# Altium PCB LED_Base_V1.PcbDoc
Units mil, origin at the board's own origin, x right, y up, seen from the top; angles counter-clockwise.
Board outline 1181.1 x 1181.1 mil, 2 copper layers (Top Layer, Bottom Layer); 15 components, 14 nets, 54 pads, 19 vias.
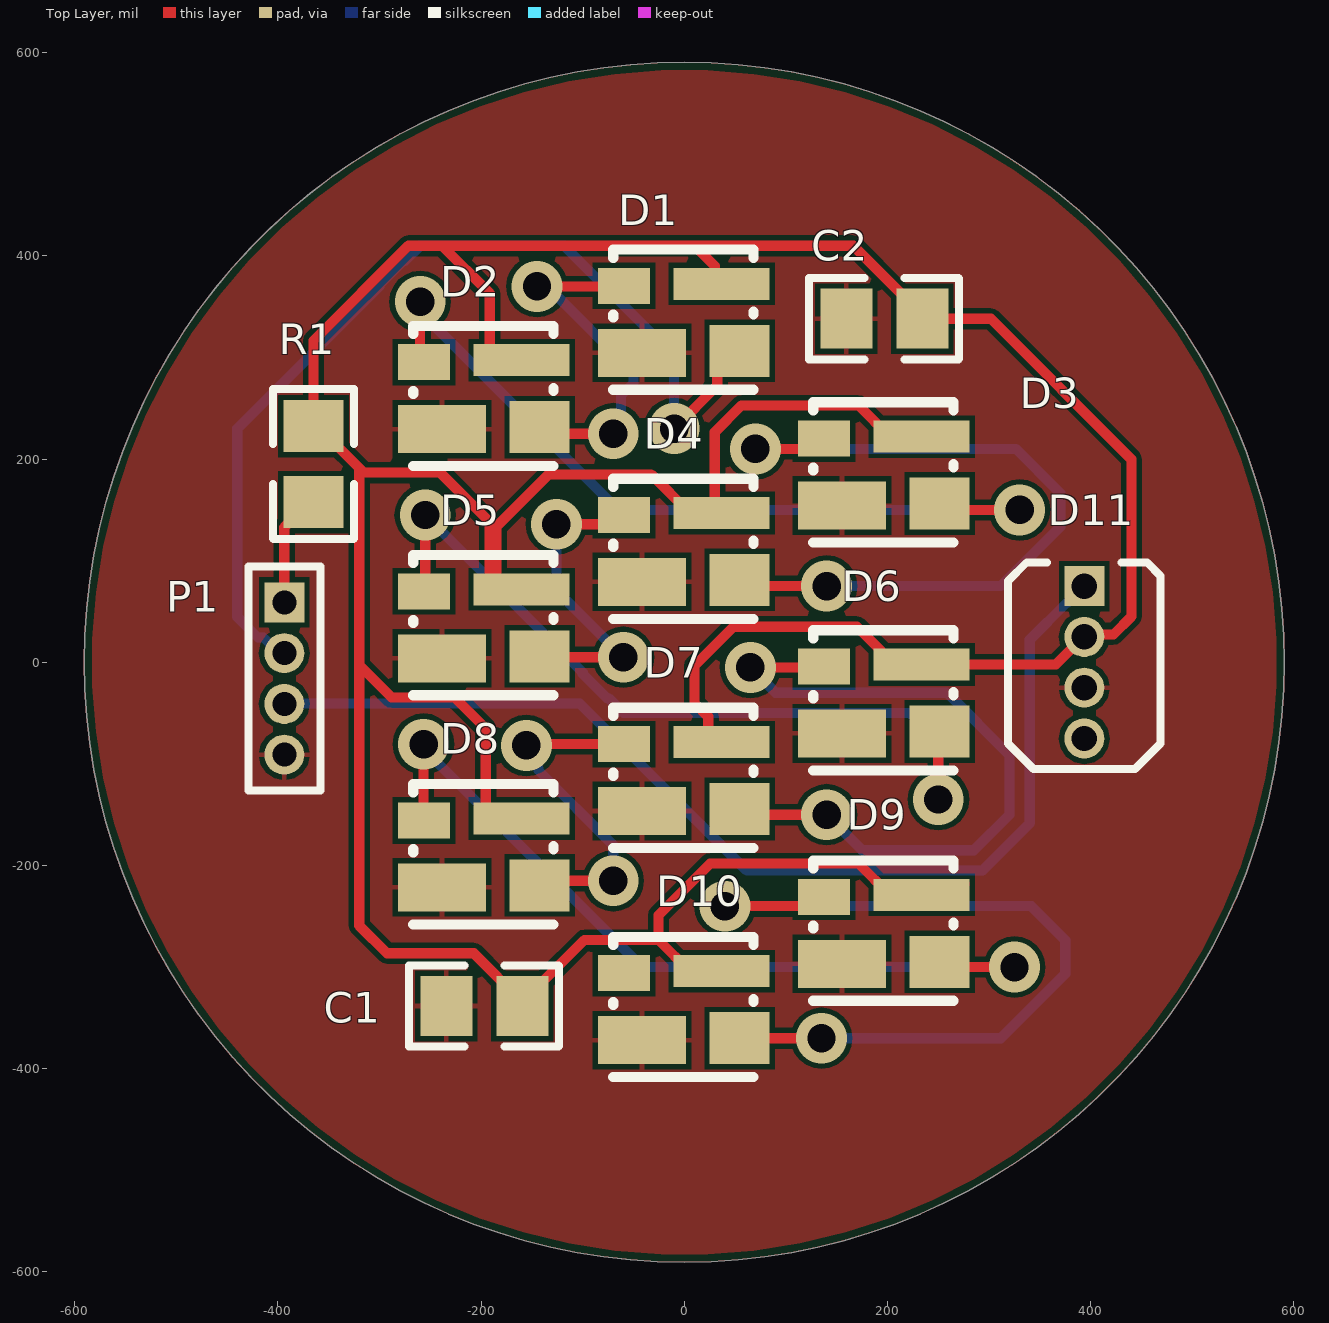
[diagram p0: Top Layer view]
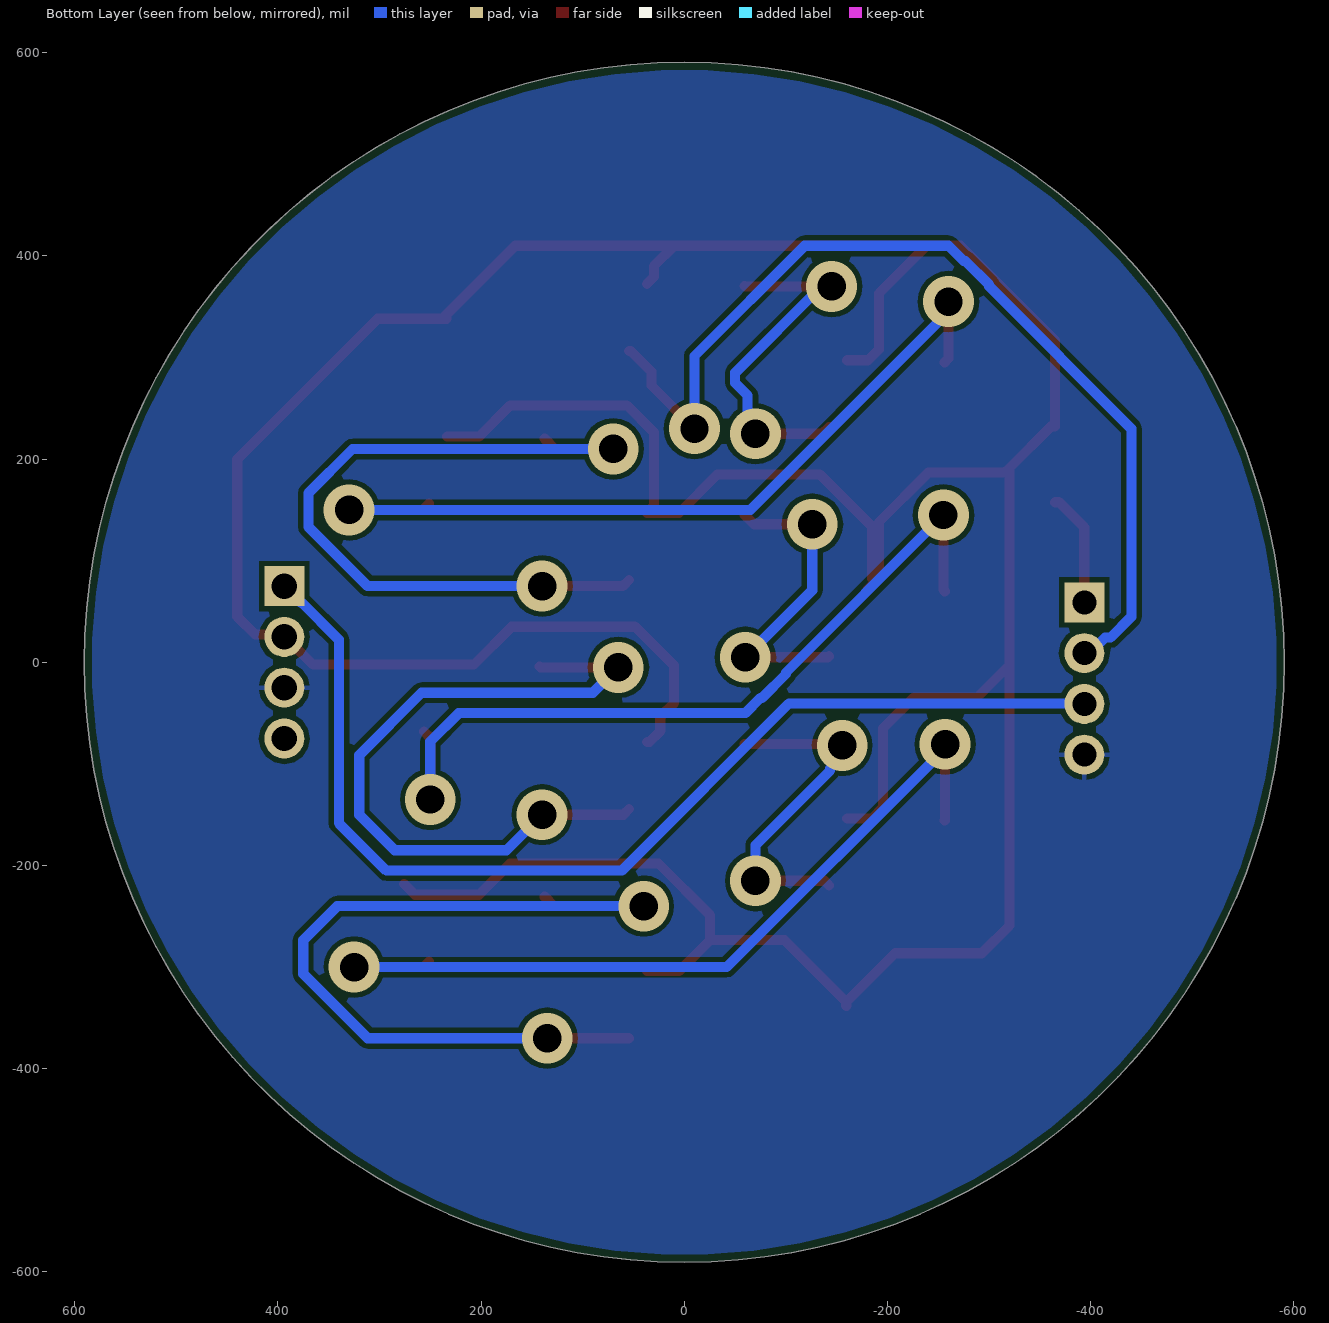
[diagram p1: Bottom Layer view, seen from below]
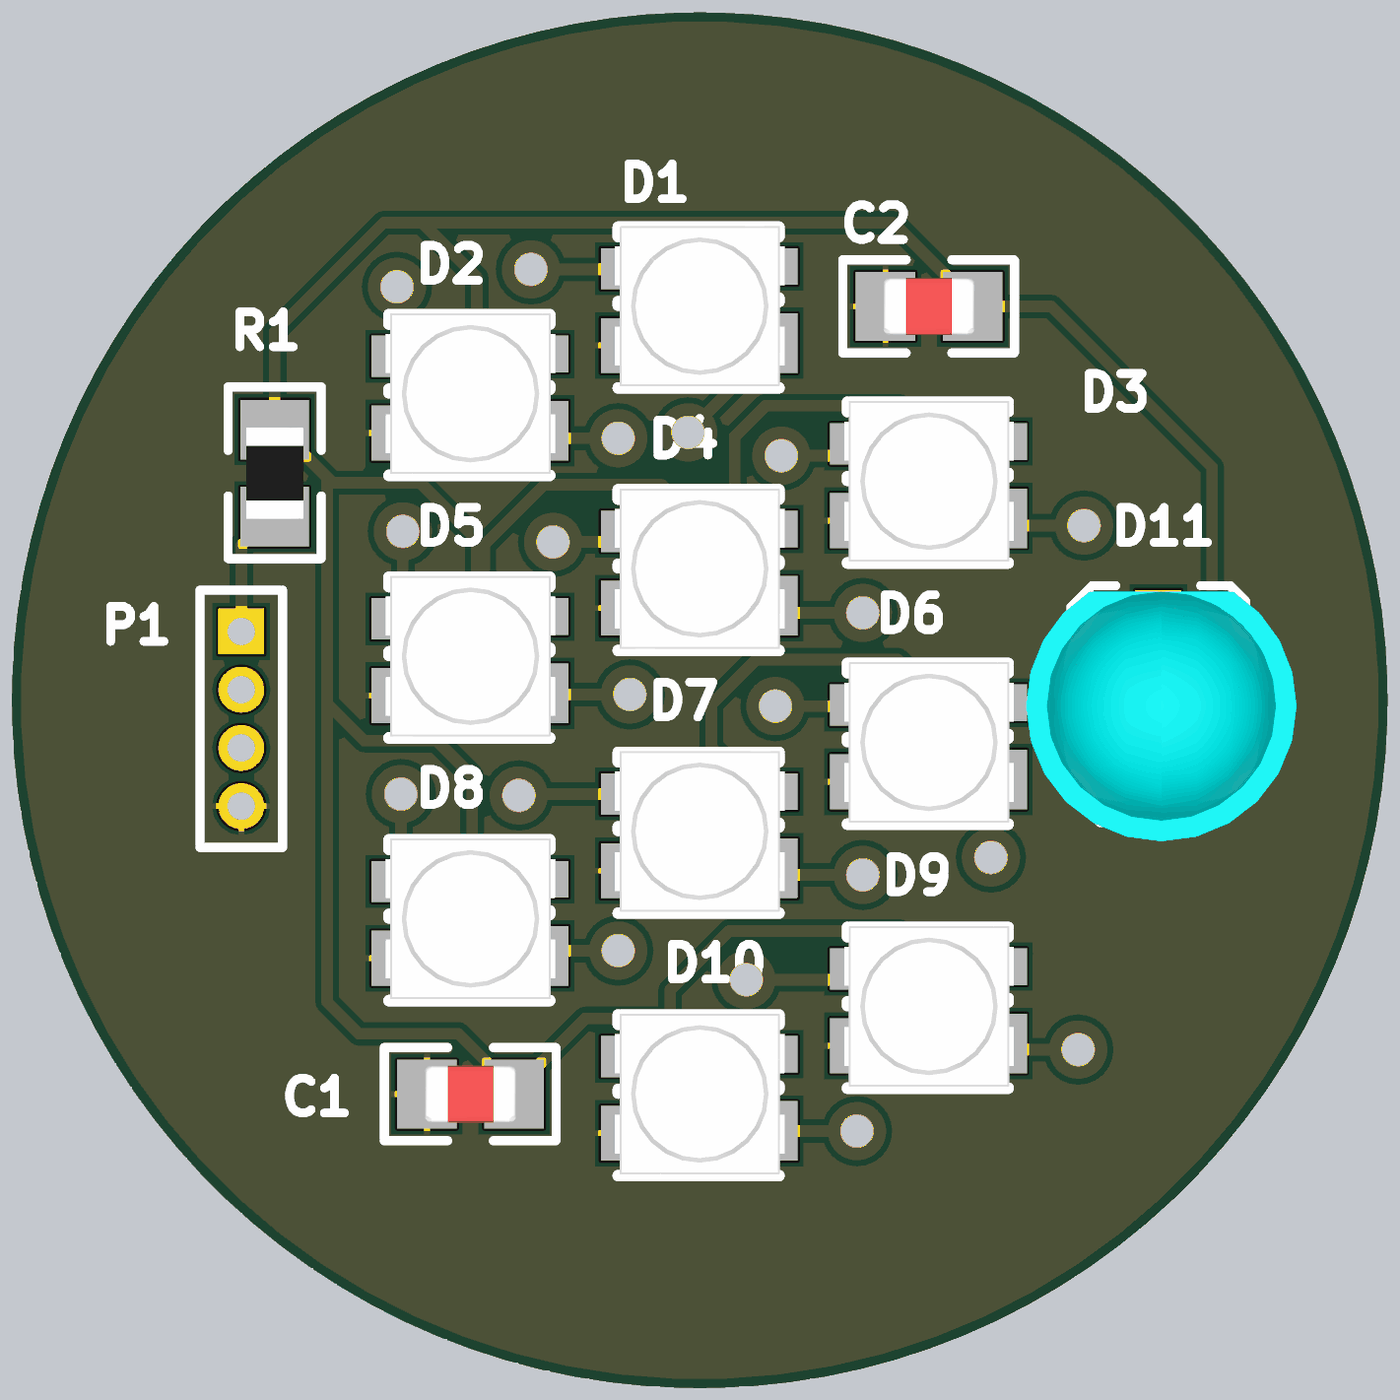
[diagram p2: 3D render of the assembled board from above, using the file's embedded part models]

## Layer stack, top to bottom
Top Solder: solder mask 0.4, Solder Resist, Dk 3.5
Top Layer: signal copper 1.4
Dielectric 1: dielectric 12.6, FR-4, Dk 4.8
Bottom Layer: signal copper 1.4
Bottom Solder: solder mask 0.4, Solder Resist, Dk 3.5

## Board outline
0,-590.55 cw(c0,0) -590.55,0 cw(c0,0) 0,590.55 cw(c0,0) 590.55,0 cw(c0,0)

## Design rules (kind name [scope] priority, off if disabled: settings)
BoardOutlineClearance [All] p1: gap=7.87 ignorepadtopadclearanceinfootprint=FALSE
Clearance [All] p1: gap=5 ignorepadtopadclearanceinfootprint=TRUE except(10: Arc-Hole Track-Hole SMDPad-Hole THPad-Hole Via-Hole Fill-Hole Poly-Hole Region-Hole Text-Hole)
ComponentClearance [All] p1: gap=5 collisioncheckmode=3 verticalgap=5 showdistances=TRUE
DiffPairsRouting [All] p1: maxlimit=10 minlimit=5 mostfreqgap=5 toplayer_minwidth=5 toplayer_maxwidth=1000 toplayer_prefwidth=5 bottomlayer_minwidth=5 bottomlayer_maxwidth=1000 bottomlayer_prefwidth=5 maxuncoupledlength=500
Height [All] p1: minheight=0 maxheight=71497.94 prefheight=500
HoleSize [All] p1: absolutevalues=TRUE maxlimit=248.03 minlimit=11.81 maxpercent=80.000 minpercent=20.000
HoleToHoleClearance [All] p1: gap=10 allowstackedmicrovias=FALSE
MinimumAnnularRing [All] p1: minimumring=6
MinimumSolderMaskSliver [All] p1: minsoldermaskwidth=6
PlaneClearance [All] p1: clearance=5
PlaneConnect PlaneConnectPowerPads [InPadClass('PowerPads')] p1: planeconnectstyle=Direct reliefexpansion=20 reliefentries=4 reliefconductorwidth=10 reliefairgap=10
PlaneConnect [All] p2: pad.planeconnectstyle=Relief pad.reliefexpansion=11.81 pad.reliefentries=4 pad.reliefconductorwidth=5 pad.reliefairgap=5 via.planeconnectstyle=Direct via.reliefexpansion=11.81 via.reliefentries=4 via.reliefconductorwidth=5 via.reliefairgap=5
PolygonConnect PolygonConnectPowerPads [All vs (InPadClass('PowerPads'))] p1: connectstyle=Direct reliefconductorwidth=10 reliefentries=4 polygonreliefangle="90 Angle" airgapwidth=10
PolygonConnect [All] p2: thpad.connectstyle=Relief thpad.reliefconductorwidth=5 thpad.reliefentries=4 thpad.polygonreliefangle="90 Angle" thpad.airgapwidth=5 smdpad.connectstyle=Relief smdpad.reliefconductorwidth=5 smdpad.reliefentries=4 smdpad.polygonreliefangle="90 Angle" smdpad.airgapwidth=5 via.connectstyle=Direct via.reliefconductorwidth=5 via.reliefentries=4 via.polygonreliefangle="90 Angle" via.airgapwidth=5
RoomDefinition Sheet1 [InComponentClass('Sheet1')] p1: confinementstyle=ConfineIn formatcopy=TRUE lockcomponents=FALSE outline -500,-495 530,-495 530,540 -500,540
RoutingVias [All] p1: holewidth=11.81 width=23.62 viastyle="Through Hole" minholewidth=11.81 minwidth=23.62 maxholewidth=23.62 maxwidth=259.84
SilkToSilkClearance [All] p1: silktosilkclearance=5
SilkToSolderMaskClearance [IsPad] p1: minsilkscreentomaskgap=5 clearancetoexposedcopper=TRUE
SolderMaskExpansion [All] p1: expansion=2 istentingtop=FALSE
UnRoutedNet [All] p1: checkbadconnections=TRUE
Width Width_10mil [All] p1: maxlimit=1000 minlimit=10 preferedwidth=10 minimp=50.000000 maximp=50.000000 favimp=50.000000
Width Width_6mil [All] p2: maxlimit=1000 minlimit=6 preferedwidth=6 minimp=50.000000 maximp=50.000000 favimp=50.000000
Width Power_20mil [All] p3: maxlimit=1000 minlimit=20 preferedwidth=20 minimp=50.000000 maximp=50.000000 favimp=50.000000
Width Power_12mil [All] p4: maxlimit=1000 minlimit=12 preferedwidth=12 minimp=50.000000 maximp=50.000000 favimp=50.000000
Width Width_5mil [All] p5: maxlimit=1000 minlimit=5 preferedwidth=5 minimp=50.000000 maximp=50.000000 favimp=50.000000
Width [All] p6: maxlimit=10 minlimit=10 preferedwidth=10
19 further rules are at their usual default settings.

## Components (designator, comment, footprint, x,y, rotation, side; value= is the part's Value field where it differs from the comment)
C1 "47uF" 0805C -196.85,-338.23 r180 top
C2 "47uF" 0805C 196.85,338.23 r180 top
D1 "Diode_SK6812MINI" SK6812MINI 0,338.23 r0 top
D2 "Diode_SK6812MINI" SK6812MINI -196.85,263.07 r0 top
D3 "Diode_SK6812MINI" SK6812MINI 196.85,187.91 r0 top
D4 "Diode_SK6812MINI" SK6812MINI 0,112.76 r0 top
D5 "Diode_SK6812MINI" SK6812MINI -196.85,37.6 r0 top
D6 "Diode_SK6812MINI" SK6812MINI 196.85,-36.38 r0 top
D7 "Diode_SK6812MINI" SK6812MINI 0,-112.76 r0 top
D8 "Diode_SK6812MINI" SK6812MINI -196.85,-187.91 r0 top
D9 "Diode_SK6812MINI" SK6812MINI 196.85,-263.07 r0 top
D10 "Diode_SK6812MINI" SK6812MINI 0,-338.23 r0 top
D11 "WS2812_Through_Hole" WS2812_THROUGH_HOLE 393.7,0 r0 top
P1 "MHDR1X4" MHDR1X4 -393.7,59.06 r270 top
R1 "470" 0805 -365,195 r90 top

## Footprints (in the part's own frame and the unit in brackets; to place one, negate y for a bottom-side part, rotate by r counter-clockwise, add the part's x,y. Pads: shape width x height; smd on the part's side, far side on the other; paste and mask are expansions set on the pad)
0805 [mm] "0805 Footprint"
  rect 1.3x1.5 smd: 1(-0.95,0) 2(0.95,0)
  silkscreen extent -1.87,-1.02 1.88,1.02, body extent -1,-0.63 1,0.62, height 0.5
0805C [mm] "0805 Footprint"
  rect 1.3x1.5 smd: 1(-0.95,0) 2(0.95,0)
  silkscreen extent -1.87,-1.02 1.88,1.02, body extent -1,-0.62 1,0.63, height 0.78
MHDR1X4 [mm] "Connector; Header; 4 Position"
  rect 1x1 hole 0.6: 1(0,0)
  round 1 hole 0.6: 2(1.27,0) 3(2.54,0) 4(3.81,0)
  silkscreen extent -0.9,-0.9 4.71,0.9
SK6812MINI [mm] "SMD LED 3535"
  rect 1.3x0.9 smd: 1(-1.509,0.82)
  rect 2.2x1.2 smd: 2(-1.059,-0.854)
  rect 1.5x1.3 smd: 3(1.385,-0.804)
  rect 2.4x0.8 smd: 4(0.935,0.87)
  silkscreen extent -1.78,-1.78 1.73,1.73, body extent -1.85,-1.75 1.85,1.75, height 1.1
WS2812_THROUGH_HOLE [mm] "THD, 4-Leads, Dia 5.9mm, Pitch 1.27mm"
  rect 1x1 hole 0.635 paste+0: 1(0,1.905)
  round 1 hole 0.635 paste+0: 2(0,0.635) 3(0,-0.635) 4(0,-1.905)
  silkscreen extent -1.91,-2.67 1.91,2.5, body extent -2.88,-3.08 3.02,2.37, height 8.6

## Part data
C1 C2: library part C, "Capacitor", Reviewed by="RM - 2018/08/05", Revision="July-2002: Re-released for DXP Platform."
D1 D2 D3 D4 D5 D6 D7 D8 D9 D10: "SMD LED 3535", Manufacturer=Adafruit, Package=SMT_LED_5MM0, Part Number=SK6812MINI, Temperature="-40°C to +85°C", Temperature Range High=+85°C, Temperature Range Low=-40°C, ComponentLink1Description=Upverter, ComponentLink1URL=https://upverter.com/upn/revision/c89e73b2d25df682/, ComponentLink2Description=Datasheet, ComponentLink2URL=https://cdn-shop.adafruit.com/product-files/1138/SK6812+LED+datasheet+.pdf, helpURL=https://upverter.com/upn/revision/c89e73b2d25df682/, Ipc Land Pattern Name=SOIC320P540X160-4, Lead Free=yes, RoHS=TRUE, Supplier 1=Digi-Key, Supplier 2=Mouser
P1: "Header, 4-Pin", LatestRevisionDate=17-Jul-2002, LatestRevisionNote="Re-released for DXP Platform.", Publisher="Altium Limited"
R1: library part R, "Resistor", Reviewed by="RM - 2018/08/05"

## Via types
v1: diameter 50, hole 28, Top Layer to Bottom Layer, tented both sides, 19 vias

## Nets (pads, with @x,y where several pads share a name; then routed paths per layer and width w, separated by ;. In a path a pad name is that pad's centre, name@x,y a point inside that pad or via, vN(x,y) a via of type N, cw(c..) or ccw(c..) an arc to the next point about the centre after c; other vN are vias at no path point)
DIN_SK6812: D1.3 P1.2 | length 972.5
  Top Layer w10: v1(-10,230) 32.39,272.39 32.39,285.98 52.98,306.57 D1.3
  Bottom Layer w10: P1.2 -398.93,9.06 -414.24,24.37 -419.6,24.37 -440,44.77 -440,230 -300,370 -300,371.57 -276.57,395 -275,395 -260,410 -151.57,410 -118.43,410 -10,301.57 v1(-10,230)
DIN_WS2812: D11.1 P1.3 | length 1077.4
  Bottom Layer w10: P1.3 -393.32,-40.56 -102.87,-40.56 61.57,-205 293.28,-205 340,-158.28 340,22.3 376.64,58.94 377.64,58.94 D11.1
DOUT1: D1.1 D2.3 | length 359.3
  Top Layer w10: v1(-145,370) -59.92,370 D1.1 ; D2.3 -135.91,225 v1(-70,225)
  Bottom Layer w10: v1(-145,370) -135,370 -50,285 -50,275 -62.35,262.65 -62.35,232.65 v1(-70,225)
DOUT2: D2.1 D3.3 | length 823.2
  Top Layer w10: v1(-260,355) -260,299.09 D2.1 ; D3.3 257.64,150 v1(330,150)
  Bottom Layer w10: v1(-260,355) -260,345 -65,150 v1(330,150)
DOUT3: D3.1 D4.3 | length 765
  Top Layer w10: D4.3 60.63,75 v1(140,75) ; v1(70,210) 127.24,210 D3.1
  Bottom Layer w10: v1(70,210) 326.57,210 370,166.57 370,133.43 311.57,75 v1(140,75)
DOUT4: D4.1 D5.3 | length 311.3
  Top Layer w10: D5.3 -141.38,5 v1(-60,5) ; v1(-125.94,135.94) -68.51,135.94 D4.1
  Bottom Layer w10: v1(-125.94,135.94) -125.94,70.94 v1(-60,5)
DOUT5: D5.1 D6.3 | length 800.5
  Top Layer w10: D5.1 -255,71.14 v1(-255,145) ; v1(250,-135) 250,-74.25 D6.3@256.22,-68.03
  Bottom Layer w10: v1(-255,145) -100,-10 -100,-11.57 -76.57,-35 -75,-35 -60,-50 222.07,-50 250,-77.93 v1(250,-135)
DOUT6: D6.1 D7.3 | length 723.9
  Top Layer w10: D7.3 60.12,-150 v1(140,-150) ; v1(65,-5) 141.38,-5 D6.1@142.28,-4.09
  Bottom Layer w10: v1(65,-5) 90,-30 258.64,-30 320,-91.36 320,-150 285,-185 175,-185 v1(140,-150)
DOUT7: D7.1 D8.3 | length 339.4
  Top Layer w10: v1(-155.4,-81.75) -154.12,-80.47 D7.1 ; D8.3 -137.76,-215 v1(-70,-215)
  Bottom Layer w10: v1(-155.4,-81.75) -155.4,-92.58 -143.54,-104.44 -143.54,-106.46 -70,-180 v1(-70,-215)
DOUT8: D8.1 D9.3 | length 826.1
  Top Layer w10: v1(-256.66,-80.56) -256.66,-155.23 D8.1 ; D9.3 256.65,-300 v1(325,-300)
  Bottom Layer w10: v1(-256.66,-80.56) -256.66,-84.91 -41.57,-300 v1(325,-300)
DOUT9: D9.1 D10.3 | length 830
  Top Layer w10: v1(40,-240) 128.23,-240 D9.1 ; D10.3 54.65,-370 v1(135,-370)
  Bottom Layer w10: v1(40,-240) 341.57,-240 375,-273.43 375,-306.57 311.57,-370 v1(135,-370)
GND: C1.2 C2.2 D1.2 D2.2 D3.2 D4.2 D5.2 D6.2 D7.2 D8.2 D9.2 D10.2 D11.3 P1.4
NetP1_1: P1.1 R1.1 | length 112.7
  Top Layer w10: P1.1 -393.7,132.83 -368.94,157.6 R1.1
VDD: C1.1 C2.1 D1.4 D2.4 D3.4 D4.4 D5.4 D6.4 D7.4 D8.4 D9.4 D10.4 D11.2 R1.2 | length 4360.5
  Top Layer w10: D5.4@-184.93,82.6 -184.93,96.74 -185,96.81 -185,133.44 -133.44,185 -32.68,185 5.32,147.01 D4.4 30,153.82 30,226.57 56.34,252.91 171.42,252.91 202.17,222.17 D3.4 ; D5.4@-180.79,71.85 -191.54,82.6 -191.54,138.1 -240.12,186.69 -315.35,186.69 -320,191.34 ; D8.4 -184.65,-153.66 -195.4,-142.91 -195.4,-65.18 -225.94,-34.65 -288.06,-34.65 -320,-2.71 ; D2.4 -180.79,297.32 -191.54,308.07 -191.54,363.1 -238.43,410 ; C1.1 C1.1@-159.45,-334.29 ; D10.4 5.32,-303.98 -25.43,-273.23 ; D7.4 34.36,-78.5 23.61,-67.76 23.61,-53.61 10,-40 10,-3.43 48.43,35 169.88,35 207.01,-2.13 238.5,-2.13 365.57,-2.13 D11.2@392.7,25 ; D1.4 30,379.29 30,390 10,410 ; D9.4@275.91,-218.07 265.16,-228.82 D9.4 202.17,-228.82 171.42,-198.07 25.36,-198.07 -25.43,-248.86 -25.43,-273.23 ; D11.2 396.05,27.35 422.35,27.35 440,45 440,200 301.77,338.23 C2.1 234.25,342.17 166.42,410 10,410 ; -320,-2.71 -320,-259.14 -292.72,-286.42 -207.32,-286.42 C1.1@-159.45,-334.29 ; -320,-2.71 -320,191.34 ; -320,191.34 -361.06,232.4 R1.2 -365,316.57 -271.57,410 -238.43,410 ; -238.43,410 10,410 ; C1.1@-159.45,-334.29 -98.39,-273.23 -25.43,-273.23
pads on no net: D10.1 D11.4

## Polygon pours and split planes (outlines as drawn)
no net on Top Layer "NONET_L01_P002" (solid, pour order 2): 0,-590.55 cw(c0,0) -590.55,0 cw(c0,0) 0,590.55 cw(c0,0) 590.55,0 cw(c0,0)
GND on Top Layer "GND_L01_P000" (solid, pour order 0): 0,-590.55 cw(c0,0) -590.55,0 cw(c0,0) 0,590.55 cw(c0,0) 590.55,0 cw(c0,0)
GND on Bottom Layer "GND_L02_P001" (solid, pour order 1): 0,-590.55 cw(c0,0) -590.55,0 cw(c0,0) 0,590.55 cw(c0,0) 590.55,0 cw(c0,0)

## Silkscreen, mask and mechanical layers (free items; w line width, h text height)
Mechanical 1:
  circle w10: c0,0 r590.55
Mechanical 13:
  circle w10: c0,0 r492.13